# EAGLE board charging (EAGLE 7.4.0)
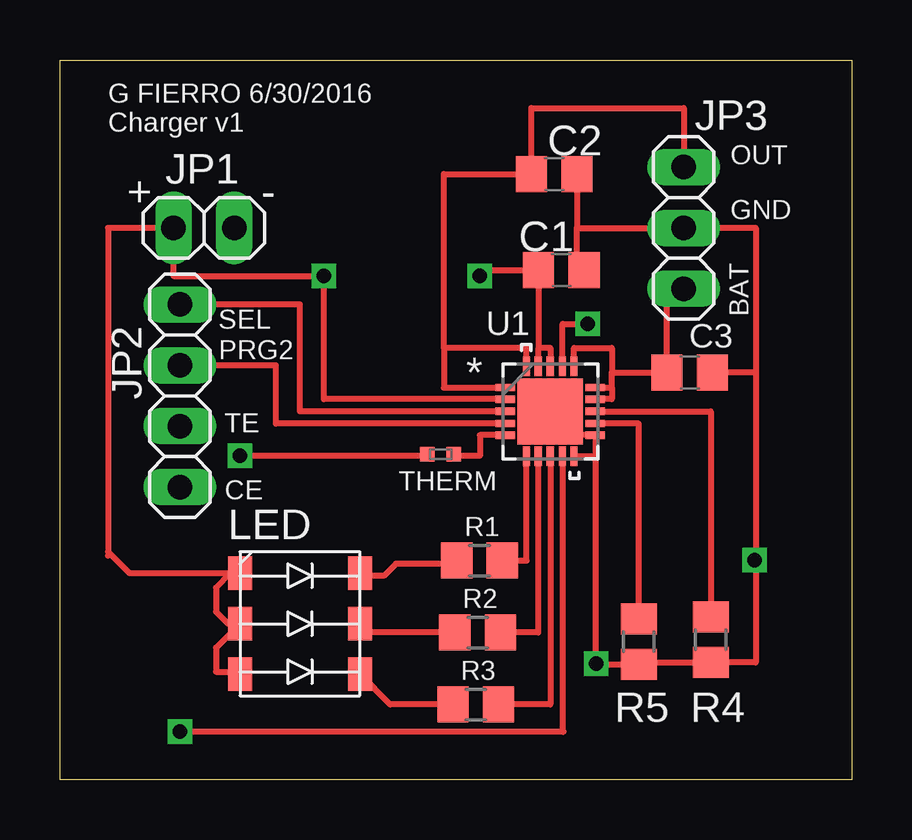
[diagram p0: board, top side]
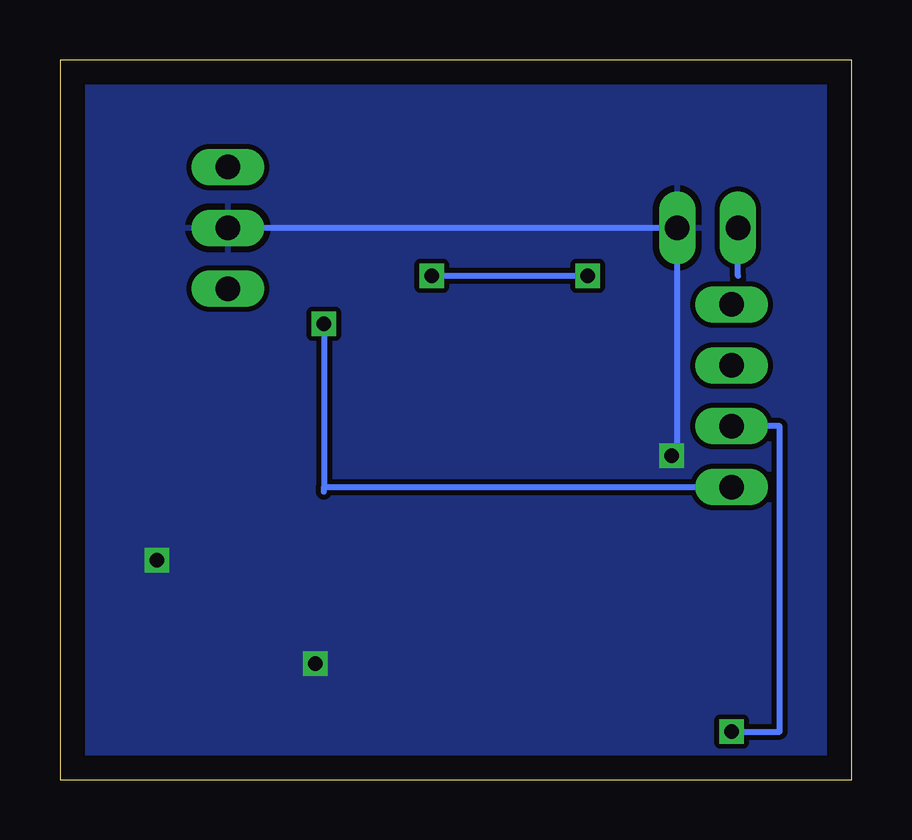
[diagram p1: board, bottom side, seen from below]

Size 33 x 30 mm. Coordinates in mm from the lower left corner, seen from the top.
Outline: 0,30 33,30 33,0 0,0 0,30
Copper layers (1*16): Top 0.035mm / dielectric 1.5mm / Bottom 0.035mm
Design rules "default": minimum track width 10mil, minimum drill 24mil, track to track 8mil, track to pad 8mil, pad to pad 8mil, via to via 8mil, smd to smd 8mil, copper to edge 40mil, drill to drill 8mil, minimum pad ring 10mil, minimum via ring 8mil, stop-mask expansion 4mil, vias tented up to drill 0mil, thermal gap 10mil

## Footprints (pad centres in the part's own frame; a part is rotated, then mirrored left to right if it is on the bottom)
C0805 = smd 1.3 x 1.5: 1 -0.95,0; 2 0.95,0
1X02 = drill 1.016 long: 1 -1.27,0; 2 1.27,0
1X04 = drill 1.016 long: 1 -3.81,0; 2 -1.27,0; 3 1.27,0; 4 3.81,0
1X03 = drill 1.016 long: 1 -2.54,0; 2 0,0; 3 2.54,0
R0805 = smd 1.3 x 1.5: 1 -0.95,0; 2 0.95,0
CT/CN0402 = smd 0.6 x 0.6: 1 -0.55,0; 2 0.55,0
QFN50P400X400X100-21N = smd 0.813 x 0.305: 1 -1.88,0.991; 2 -1.88,0.508; 3 -1.88,0; 4 -1.88,-0.508; 5 -1.88,-0.991; 11 1.88,-0.991; 12 1.88,-0.508; 13 1.88,0; 14 1.88,0.508; 15 1.88,0.991 | smd 0.305 x 0.813: 6 -0.991,-1.88; 7 -0.508,-1.88; 8 0,-1.88; 9 0.508,-1.88; 10 0.991,-1.88; 16 0.991,1.88; 17 0.508,1.88; 18 0,1.88; 19 -0.508,1.88; 20 -0.991,1.88 | smd 2.743 x 2.743: 21 0,0
CREE_PLCC6_3-IN-1_SMD_LED_CLP6C-FKB = smd 1 x 1.4: BLUE_ANODE -2.5,-2.1; BLUE_CATHODE 2.5,-2.1; GREEN_ANODE -2.5,0; GREEN_CATHODE 2.5,0; RED_ANODE -2.5,2.1; RED_CATHODE 2.5,2.1

## Placement (x,y rotation side)
C1  10uF  [C0805]  20.9,21.24 0 top
C2  4.7uF  [C0805]  20.6,25.24 0 top
C3  4.7uF  [C0805]  26.25,16.97 0 top
JP1  [1X02]  6,23 0 top
JP2  [1X04]  5,16 90 top
JP3  [1X03]  26,23 270 top
R1  470  [R0805]  17.49,9.13 0 top
R2  470  [R0805]  17.41,6.13 0 top
R3  470  [R0805]  17.33,3.13 0 top
R4  2k  [R0805]  27.13,5.83 270 top
R5  20k  [R0805]  24.13,5.75 270 top
THERM  NCP15XH103J03RC  [CT/CN0402]  15.87,13.56 0 top
U1  MCP73871-2CCI/ML  [QFN50P400X400X100-21N]  20.44,15.35 0 top
U$1  CLP6C-FKB  [CREE_PLCC6_3-IN-1_SMD_LED_CLP6C-FKB]  10,6.5 0 top

## Library data of the parts
C1-C3 R1-R5 = resistor
JP1-JP3 = pinhead
THERM = varistor
U1 = Microchip_By_element14_Batch_1; MPN: MCP73871-2CCI/ML; OC_FARNELL: 1642489; OC_NEWARK: 54M4957; PACKAGE: QFN-20; SUPPLIER: Microchip
U$1 = insole

## Nets
GND: C1.2 C2.2 C3.2 JP1.2 JP3.2 R4.2 R5.2 THERM.1 U1.10 U1.11 U1.21
N$1: R3.2 U1.8
N$2: R2.2 U1.7
N$3: R1.2 U1.6
N$4: R1.1 U$1.RED_CATHODE
N$5: R2.1 U$1.GREEN_CATHODE
N$6: R3.1 U$1.BLUE_CATHODE
N$7: JP2.1 U1.17
N$8: JP2.2 U1.9
N$9: JP2.3 U1.4
N$10: JP2.4 U1.3
N$11: C2.1 JP3.1 U1.1 U1.20
N$12: C3.1 JP3.3 U1.14 U1.15 U1.16
N$13: THERM.2 U1.5
N$14: R4.1 U1.13
N$16: R5.1 U1.12
VCC: C1.1 JP1.1 U1.2 U1.18 U1.19 U$1.BLUE_ANODE U$1.GREEN_ANODE U$1.RED_ANODE

## Tracks (layer width: path | path; a pad name or v marks a point on that pad's centre or on a via)
GND  (via drill 0.61)
  Top 0.254: U1.11 22.32,13.47 U1.10 | U1.11 22.32,4.8 R5.2 24.13,4.88 R4.2 29,4.88 29,17 | 29,17 29,23 JP3.2 21.55,23 | 22,21 21.85,21 C1.2 21.55,21.24 21.55,23 | C3.2 27.2,17 29,17 | C2.2 21.55,23 | U1.21 21.5,15.35 21.5,14.36 U1.11 | THERM.1 15.26,13.5 v7.5,13.5
  Bottom 0.254: JP3.2 JP1.2 7.27,13.73 v7.5,13.5
  other vias: 22.35,4.83 28.96,9.14
  pour Bottom: -0.25,29.97 33.53,29.97 33.53,-0.76 -0.25,-0.76
N$1
  Top 0.254: U1.8 20.44,3.13 R3.2
N$2
  Top 0.254: U1.7 19.93,6.13 R2.2
N$3
  Top 0.254: R1.2 19.45,9.13 U1.6
N$4
  Top 0.254: R1.1 16.54,9 14,9 13.5,8.5 12.6,8.5 U$1.RED_CATHODE
N$5
  Top 0.254: U$1.GREEN_CATHODE 12.87,6.13 R2.1 16.46,6.46 16.5,6.5 16.5,6
N$6
  Top 0.254: R3.1 13.77,3.13 U$1.BLUE_CATHODE
N$7  (via drill 0.61)
  Top 0.254: U1.17 20.95,19 v22,19
  Bottom 0.254: v22,19 22,12.19 | 22,12 22,12.19 | 22,12.19 JP2.1
N$8  (via drill 0.61)
  Top 0.254: U1.9 20.95,2 | 20.95,2 21,2 | 20.95,2 v5,2
  Bottom 0.254: v5,2 3,2 3,14.73 JP2.2
N$9
  Top 0.254: U1.4 9,14.84 9,17.27 JP2.3
N$10
  Top 0.254: U1.3 10,15.35 10,19.81 JP2.4
N$11
  Top 0.254: U1.20 19.45,18 16,18 | 16,18 16,25.24 C2.1 19.65,28 26,28 JP3.1 | 16,18 16,16.34 U1.1
N$12
  Top 0.254: U1.15 23,16.34 | 23,16.34 23,15.86 U1.14 | 23,16.34 23,16.97 | 23,16.97 C3.1 25.3,20.46 JP3.3 | U1.16 21.43,18 23,18 23,16.97
N$13
  Top 0.254: U1.5 17.5,14.36 17.5,13.5 16.42,13.5 THERM.2
N$14
  Top 0.254: U1.13 27.13,15.35 R4.1
N$16
  Top 0.254: R5.1 24.13,14.84 U1.12
VCC  (via drill 0.61)
  Top 0.254: 19.95,18 C1.1 17.5,21.24 v17.5,21 | 2,9.5 2,23 JP1.1 4.73,21 v11,21 11,15.86 U1.2 | 2,9.5 2,9.34 | 19.95,18 20.44,18 U1.18 | 19.95,18 19.95,17.23 U1.19 | 2,9.5 2.9,8.6 U$1.RED_ANODE 7.1,8.6 6.5,8 6.5,7 7,6.5 U$1.GREEN_ANODE 6.5,5.5 6.5,4.5 7.4,4.5 U$1.BLUE_ANODE
  Bottom 0.254: 4.73,21 JP1.1 | v11,21 v17.5,21

## Text on the board
tPlace: G FIERRO 6/30/2016 / Charger v1 | OUT | + | - | GND | SEL | BAT | PRG2 | TE | CE